# EAGLE board Cree_XP-E_Turn (EAGLE 6.4)
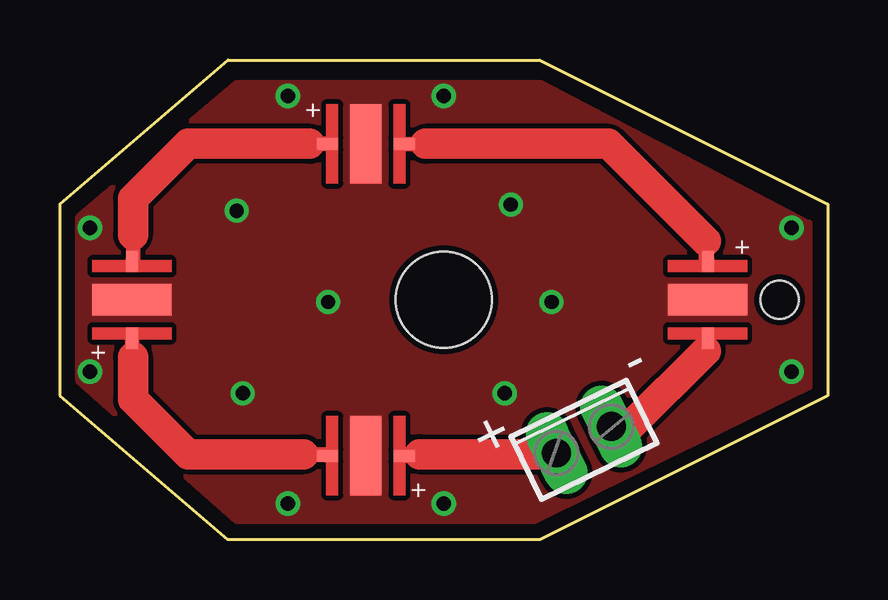
[diagram p0: board, top side]
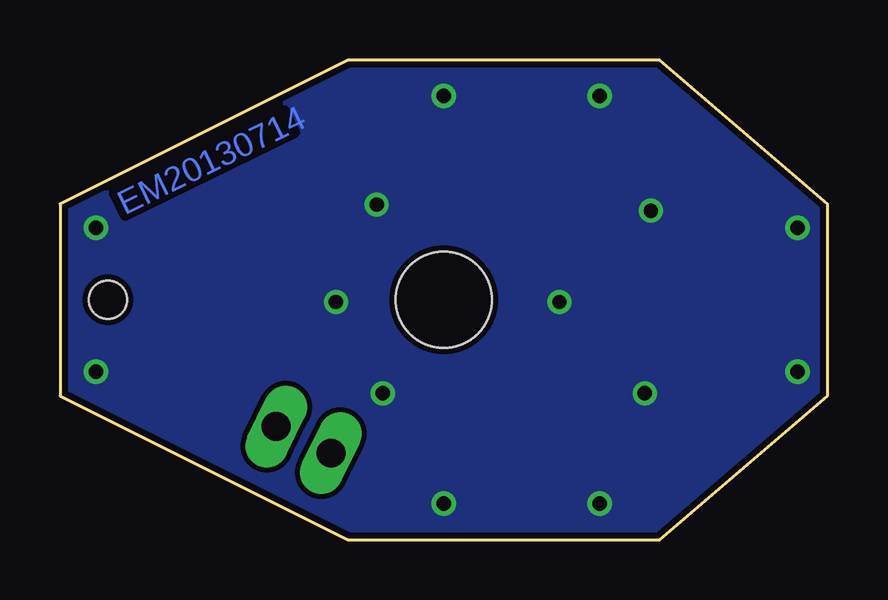
[diagram p1: board, bottom side, seen from below]

Size 32 x 20 mm. Coordinates in mm from the lower left corner, seen from the top.
Outline: 7,0 0,6 0,14 7,20 20,20 32,14 32,6 20,0 7,0
Copper layers (1*16): Top 0.035mm / dielectric 1.5mm / Bottom 0.035mm
Design rules "default *": minimum track width 10mil, minimum drill 24mil, track to track 8mil, track to pad 8mil, pad to pad 8mil, via to via 8mil, smd to smd 8mil, copper to edge 10mil, drill to drill 10mil, minimum pad ring 10mil, minimum via ring 8mil, stop-mask expansion 4mil, vias tented up to drill 0mil, thermal gap 10mil
Holes 4 mm at 16,10
Holes 1.59 mm at 30,10

## Footprints (pad centres in the part's own frame; a part is rotated, then mirrored left to right if it is on the bottom)
CREE_XP-E = smd 0.9 x 0.5: AN -1.6,0; CT 1.6,0 | smd 1.3 x 3.3: TH 0,0
2POL254 = drill 1.2 long: 1 -1.27,0; 2 1.27,0

## Placement (x,y rotation side)
LED1  LUXEON_REBELCREE_XP-E  [CREE_XP-E]  27,10 270 top
LED2  LUXEON_REBELCREE_XP-E  [CREE_XP-E]  12.75,16.5 0 top
LED3  LUXEON_REBELCREE_XP-E  [CREE_XP-E]  3,10 90 top
LED4  LUXEON_REBELCREE_XP-E  [CREE_XP-E]  12.75,3.5 180 top
X1  [2POL254]  21.84,4.16 26 top

## Library data of the parts
LED1-LED4 = Combined
X1 = con-phoenix-254; OC_FARNELL: unknown; OC_NEWARK: unknown

## Nets
N$2: LED1.AN LED2.CT
N$3: LED2.AN LED3.CT
N$4: LED3.AN LED4.CT
THERMAL: LED1.TH LED2.TH LED3.TH LED4.TH
V+: LED4.AN X1.1
V-: LED1.CT X1.2

## Tracks (layer width: path | path; a pad name or v marks a point on that pad's centre or on a via)
N$2
  Top 0.61: LED1.AN 26.92,11.68 26.92,12.45 | 15.24,16.51 15.23,16.5 LED2.CT
  Top 1.27: 26.92,12.45 22.86,16.51 15.24,16.51
N$3
  Top 0.61: LED2.AN 10.41,16.51 | 3.05,12.7 3.05,11.65 LED3.CT
  Top 1.27: 10.41,16.51 5.33,16.51 3.05,14.22 3.05,12.7
N$4
  Top 0.61: LED3.AN 3,7.67 3.05,7.62 | 10.16,3.56 11.09,3.56 LED4.CT
  Top 1.27: 3.05,7.62 3.05,5.84 5.33,3.56 10.16,3.56
THERMAL  (via drill 0.6)
  other vias: 7.37,13.72 18.8,13.97 11.18,9.91 7.62,6.1 20.49,9.91 18.54,6.1 30.5,13 30.5,7 9.5,18.5 16,18.5 16,1.5 9.5,1.5 1.25,7 1.25,13
  pour Top: 0.76,6.6 0.76,13.46 7.37,19.05 20.07,19.05 31.24,13.21 31.24,6.35 19.81,0.76 7.37,0.76
  pour Bottom: -1.02,5.33 -1.02,14.73 6.6,21.34 20.32,21.34 33.27,14.99 33.27,5.59 20.32,-1.02 6.6,-1.02
V+
  Top 0.61: LED4.AN 14.93,3.5 14.99,3.56
  Top 1.27: 14.99,3.56 20.66,3.56 X1.1
V-
  Top 0.61: LED1.CT 26.92,8.32 26.92,7.87
  Top 1.27: 26.92,7.87 23.77,4.71 X1.2

## Text on the board
Bottom: EM20130714
tPlace: - | +